# EAGLE board 1.5KbeaconDetectorV1.0 (EAGLE 9.6.2)
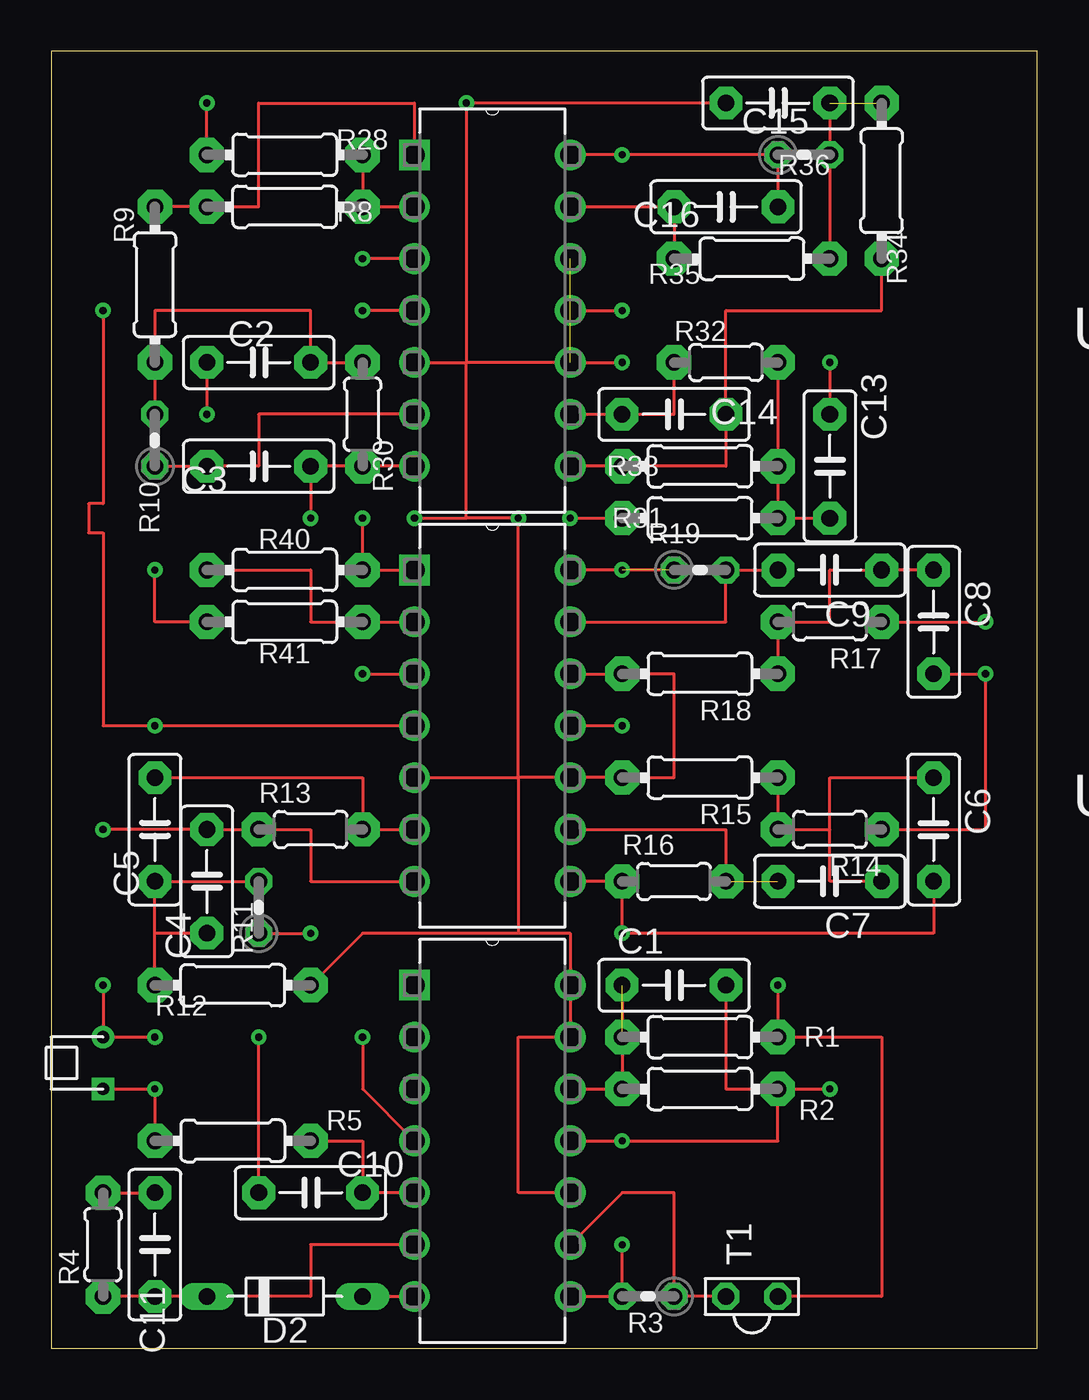
[diagram p0: board, top side]
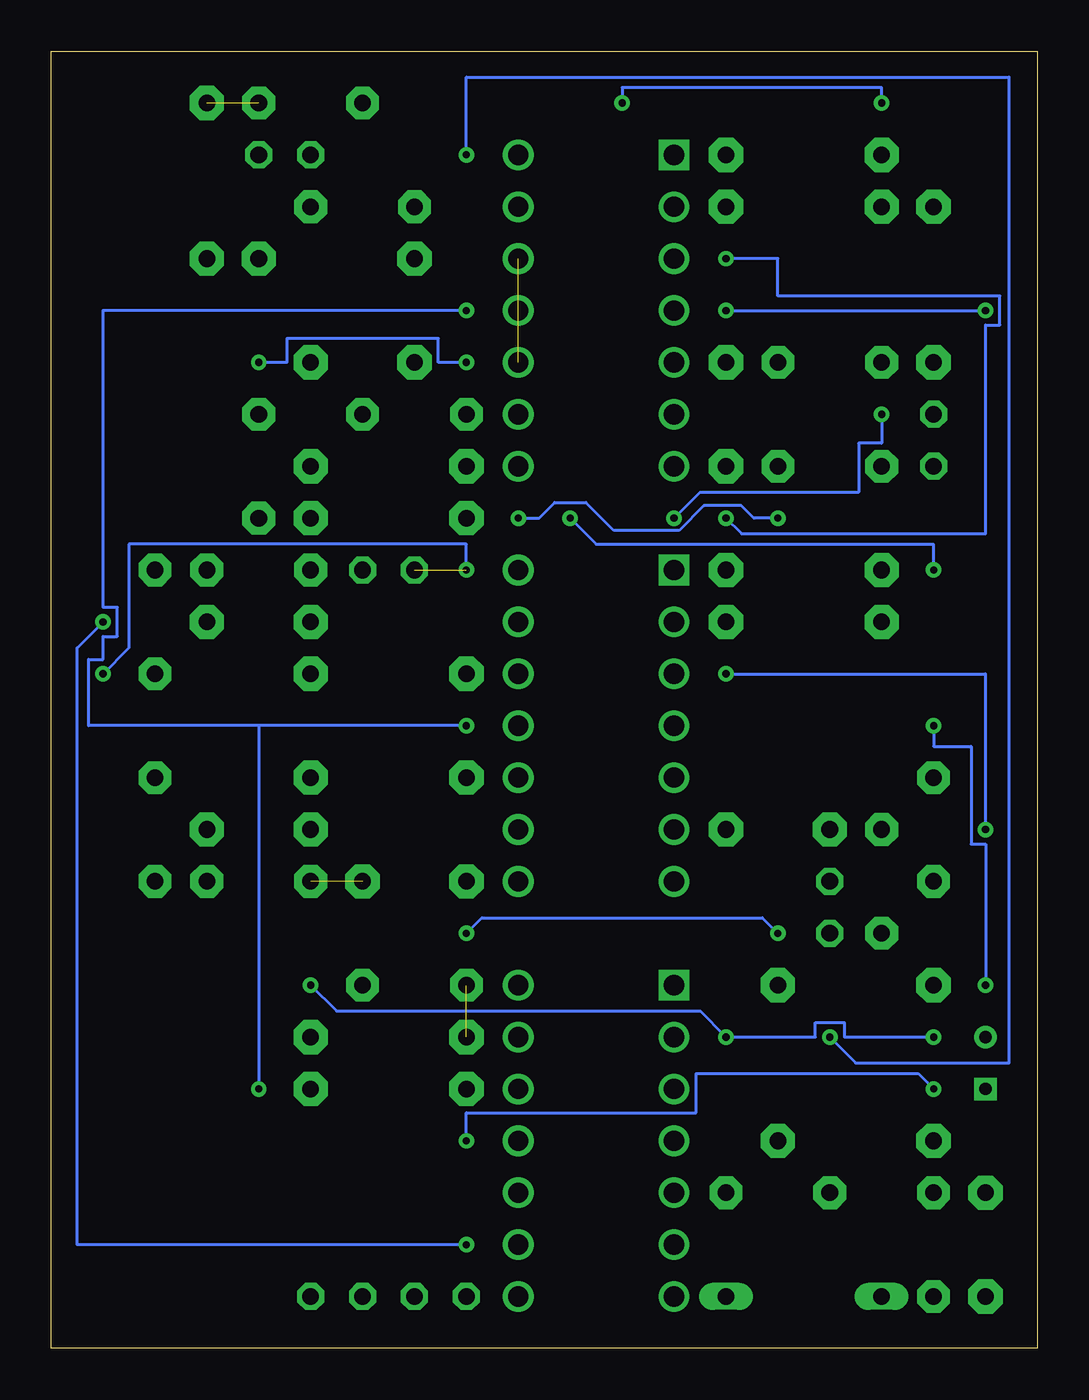
[diagram p1: board, bottom side, seen from below]

Size 48.26 x 63.5 mm. Coordinates in mm from the lower left corner, seen from the top.
Outline: 0,0 48.26,0 48.26,63.5 0,63.5 0,0
Copper layers (1*16): Top 0.035mm / dielectric 1.5mm / Bottom 0.035mm
Design rules "default": minimum track width 6mil, minimum drill 0.35mm, track to track 6mil, track to pad 6mil, pad to pad 6mil, via to via 6mil, smd to smd 6mil, copper to edge 40mil, drill to drill 6mil, minimum pad ring 10mil, minimum via ring 8mil, stop-mask expansion 4mil, vias tented up to drill 0mil, thermal gap 10mil

## Footprints (pad centres in the part's own frame; a part is rotated, then mirrored left to right if it is on the bottom)
C5B2.5 = drill 0.813 pad 1.6 octagon: 1 -2.54,0; 2 2.54,0
D-7.5 = drill 0.813 long: A 3.81,0; C -3.81,0
0204/7 = drill 0.813 pad 1.676 octagon: 1 -3.81,0; 2 3.81,0
0204V = drill 0.813 octagon: 1 -1.27,0; 2 1.27,0
0204/5 = drill 0.813 pad 1.676 octagon: 1 -2.54,0; 2 2.54,0
LPT80A = drill 0.813 octagon: C 0,-1.27; E 0,1.27
DIP254P762X533-14 = drill 0.991 square: 1 -7.62,15.24 | drill 0.991: 2 -7.62,12.7; 3 -7.62,10.16; 4 -7.62,7.62; 5 -7.62,5.08; 6 -7.62,2.54; 7 -7.62,0; 8 0,0; 9 0,2.54; 10 0,5.08; 11 0,7.62; 12 0,10.16; 13 0,12.7; 14 0,15.24
WIRECONNECT2PIN = drill 0.6 square: P$1 2.54,0 | drill 0.6: P$2 2.54,2.54

## Placement (x,y rotation side)
C1  10nF  [C5B2.5]  30.48,17.78 0 top
C2  56nF  [C5B2.5]  10.16,48.26 0 top
C3  10nF  [C5B2.5]  10.16,43.18 0 top
C4  10nF  [C5B2.5]  7.62,22.86 90 top
C5  10nF  [C5B2.5]  5.08,25.4 90 top
C6  10nF  [C5B2.5]  43.18,25.4 270 top
C7  10nF  [C5B2.5]  38.1,22.86 180 top
C8  10nF  [C5B2.5]  43.18,35.56 270 top
C9  10nF  [C5B2.5]  38.1,38.1 180 top
C10  0.1uF  [C5B2.5]  12.7,7.62 0 top
C11  0.1uF  [C5B2.5]  5.08,5.08 90 top
C13  470nF  [C5B2.5]  38.1,43.18 270 top
C14  10nF  [C5B2.5]  30.48,45.72 0 top
C15  5.6nF  [C5B2.5]  35.56,60.96 0 top
C16  10nF  [C5B2.5]  33.02,55.88 0 top
D2  [D-7.5]  11.43,2.54 0 top
R1  100kOhm  [0204/7]  31.75,15.24 0 top
R2  100kOhm  [0204/7]  31.75,12.7 180 top
R3  1kOhm  [0204V]  29.21,2.54 180 top
R4  330kOhm  [0204/5]  2.54,5.08 90 top
R5  8.2kOhm  [0204/7]  8.89,10.16 180 top
R8  91kOhm  [0204/7]  11.43,55.88 0 top
R9  11kOhm  [0204/7]  5.08,52.07 270 top
R10  12kOhm  [0204V]  5.08,44.45 90 top
R11  16kOhm  [0204V]  10.16,21.59 90 top
R12  330Ohm  [0204/7]  8.89,17.78 0 top
R13  300kOhm  [0204/5]  12.7,25.4 0 top
R14  18kOhm  [0204/5]  38.1,25.4 180 top
R15  390Ohm  [0204/7]  31.75,27.94 180 top
R16  330kOhm  [0204/5]  30.48,22.86 0 top
R17  18kOhm  [0204/5]  38.1,35.56 180 top
R18  750Ohm  [0204/7]  31.75,33.02 180 top
R19  160kOhm  [0204V]  31.75,38.1 0 top
R28  10kOhm  [0204/7]  11.43,58.42 180 top
R30  12kOhm  [0204/5]  15.24,45.72 90 top
R31  1.8kOhm  [0204/7]  31.75,40.64 0 top
R32  1.8Ohm  [0204/5]  33.02,48.26 0 top
R33  2kOhm  [0204/7]  31.75,43.18 0 top
R34  470Ohm  [0204/7]  40.64,57.15 90 top
R35  360Ohm  [0204/7]  34.29,53.34 0 top
R36  510Ohm  [0204V]  36.83,58.42 0 top
R40  91kOhm  [0204/7]  11.43,38.1 180 top
R41  10kOhm  [0204/7]  11.43,35.56 180 top
T1  LPT80A  [LPT80A]  34.29,2.54 90 top
U$1  MCP6004-E/P  [DIP254P762X533-14]  25.4,2.54 0 top
U$2  MCP6004-E/P  [DIP254P762X533-14]  25.4,22.86 0 top
U$4  WIRECONNECT2PIN  [WIRECONNECT2PIN]  0,12.7 0 top
U$5  MCP6004-E/P  [DIP254P762X533-14]  25.4,43.18 0 top

## Library data of the parts
C1-C11 C13-C16 = capacitor-wima
D2 = diode
R1-R5 R8-R19 R28 R30-R36 R40 R41 = adafruit
T1 = opto-trans-siemens; OC_FARNELL: unknown; OC_NEWARK: unknown
U$1 U$2 U$5 = MCP6004-E_P; DESCRIPTION: Op Amp Quad Low Power Amplifier R-R I/O 6V Automotive 14-Pin PDIP Tube; DIGI-KEY_PART_NUMBER: MCP6004-E/P-ND; MF: Microchip Technology; MP: MCP6004-E/P; PACKAGE: DIP-14 Microchip; PURCHASE-URL: https://pricing.snapeda.com/search/part/MCP6004-E/P/?ref=eda
U$4 = connectors

## Nets
1V65: C2.1 C13.1 C15.1 R12.2 R15.2 R18.2 R28.2 R41.2 U$1.10 U$1.13 U$1.14 U$2.5 U$2.10 U$2.12 U$5.5 U$5.10 U$5.12
AMPOUT: R8.1 R9.1 U$5.1
BPASS1: C8.2 R14.1 R19.1 U$2.14
BPASS2: C6.2 R11.1 R16.1 U$2.8
BPASS3: C4.2 R13.1 U$2.3 U$2.7
BPASSAMPOUT: R40.1 U$2.1 U$5.3
GND: C1.2 C11.2 R2.1 R4.2 R5.2 U$1.11 U$2.11 U$4.P$1 U$5.11
LPASS1: C3.2 R30.1 R31.1 U$5.7
LPASS2: C14.2 R33.1 R34.1 U$5.8
LPASS3: C10.1 C16.2 R36.1 U$5.14
N$1: C1.1 R1.1 R2.2 U$1.12
N$2: D2.A U$1.7
N$3: C10.2 R5.1 U$1.5
N$4: C3.1 R10.1 U$5.6
N$5: R3.1 T1.E U$1.9
N$6: C2.2 R9.2 R10.2 R30.2
N$8: C4.1 C5.1 R11.2 R12.1
N$9: C7.2 R16.2 U$2.9
N$10: C6.1 C7.1 R14.2 R15.1
N$11: C9.2 R19.2 U$2.13
N$12: C8.1 C9.1 R17.2 R18.1
N$13: C5.2 R13.2 U$2.6
N$18: R8.2 R28.1 U$5.2
N$19: C14.1 R32.1 U$5.9
N$20: C13.2 R31.2 R32.2 R33.2
N$22: C16.1 R35.1 U$5.13
N$25: R40.2 R41.1 U$2.2
N$26: C15.2 R34.2 R35.2 R36.2
PEAKDETECT: C11.1 D2.C R4.1 U$1.6
PHOTOBUFFER: R3.2 R17.1 U$1.8
VCC: R1.2 T1.C U$1.4 U$2.4 U$4.P$2 U$5.4

## Tracks (layer width: path | path; a pad name or v marks a point on that pad's centre or on a via)
1V65  (via drill 0.35)  (1 unrouted)
  Top 0.152: U$2.12 R18.2 30.48,33.02 30.48,27.94 R15.2 U$2.10 22.86,27.94 | 22.86,27.94 22.86,20.32 | 22.86,27.94 v22.86,40.64 20.32,40.64 | R41.2 5.08,35.56 v5.08,38.1 | U$2.5 22.86,27.94 | C2.1 v7.62,45.72 | v17.78,40.64 20.32,40.64 | 20.32,40.64 20.32,48.26 | U$5.5 20.32,48.26 | 20.32,48.26 U$5.10 v27.94,48.26 | R28.2 v7.62,60.96 | 20.32,48.26 v20.32,60.96 C15.1 | v38.1,48.26 C13.1 | U$1.10 22.86,7.62 22.86,15.24 U$1.13 U$1.14 25.4,20.32 22.86,20.32 | 22.86,20.32 15.24,20.32 R12.2
  Bottom 0.152: v22.86,40.64 21.59,39.37 5.08,39.37 v5.08,38.1 | v7.62,45.72 7.62,44.31 8.75,44.31 8.75,41.91 16.51,41.91 v17.78,40.64 | v7.62,60.96 7.62,61.72 20.32,61.72 v20.32,60.96 | v27.94,48.26 29.31,48.26 29.31,49.43 36.73,49.43 36.73,48.26 v38.1,48.26
AMPOUT
  Top 0.152: R9.1 R8.1 10.16,55.88 10.16,60.96 17.78,60.96 U$5.1
BPASS1  (via drill 0.35)  (1 unrouted)
  Top 0.152: R19.1 U$2.14 | R14.1 45.72,25.4 v45.72,33.02 C8.2
  Bottom 0.152: v45.72,33.02 44.45,34.29 44.45,39.37 27.94,39.37 v27.94,38.1
BPASS2  (via drill 0.35)
  Top 0.152: C6.2 43.18,20.32 v27.94,20.32 R16.1 U$2.8 | R11.1 v12.7,20.32
  Bottom 0.152: v27.94,20.32 27.18,21.08 13.46,21.08 v12.7,20.32
BPASS3  (via drill 0.35)
  Top 0.152: U$2.7 12.7,22.86 12.7,25.4 R13.1 C4.2 v2.54,25.4 | v15.24,33.02 U$2.3
  Bottom 0.152: v15.24,33.02 2.54,33.02 v2.54,25.4
BPASSAMPOUT  (via drill 0.35)
  Top 0.152: U$2.1 R40.1 v15.24,40.64 | U$5.3 v15.24,53.34
  Bottom 0.152: v15.24,53.34 12.7,53.34 12.7,51.51 1.83,51.51 1.83,50.09 2.54,50.09 2.54,39.88 14.48,39.88 v15.24,40.64
GND  (via drill 0.35)
  Top 0.152: U$2.11 v27.94,30.48 | U$5.11 v27.94,50.8 | R4.2 C11.2 | R2.1 35.56,10.16 v27.94,10.16 U$1.11 | C1.2 33.02,12.7 R2.1 | R2.1 v38.1,12.7 | R5.2 v5.08,12.7 U$4.P$1
  Bottom 0.152: v27.94,30.48 38.1,30.48 | 38.1,30.48 v38.1,12.7 | v27.94,50.8 45.72,50.8 45.72,36.27 45.01,36.27 45.01,34.85 45.72,34.85 45.72,33.73 46.43,33.73 46.43,30.48 38.1,30.48 | v5.08,12.7 5.84,13.46 16.7,13.46 16.7,11.53 27.94,11.53 v27.94,10.16
LPASS1  (via drill 0.35)
  Top 0.152: U$5.7 R30.1 C3.2 v12.7,40.64 | v25.4,40.64 R31.1
  Bottom 0.152: v25.4,40.64 24.38,40.64 23.62,41.4 22.1,41.4 20.73,40.03 17.53,40.03 16.32,41.25 14.48,41.25 13.87,40.64 v12.7,40.64
LPASS2
  Top 0.152: U$5.8 R33.1 33.02,43.18 C14.2 33.02,50.8 40.64,50.8 R34.1
LPASS3  (via drill 0.35)
  Top 0.152: C16.2 R36.1 v27.94,58.42 U$5.14 | C10.1 v10.16,15.24
  Bottom 0.152: v27.94,58.42 27.94,62.23 1.39,62.23 1.39,13.97 8.89,13.97 v10.16,15.24
N$1  (1 unrouted)
  Top 0.152: C1.1 R2.2 U$1.12
N$2
  Top 0.152: D2.A U$1.7
N$3
  Top 0.152: U$1.5 C10.2 15.24,10.16 R5.1
N$4
  Top 0.152: U$5.6 10.16,45.72 10.16,43.18 C3.1 R10.1
N$5
  Top 0.152: T1.E R3.1 30.48,7.62 27.94,7.62 U$1.9
N$6
  Top 0.152: R30.2 C2.2 12.7,50.8 5.08,50.8 R9.2 R10.2
N$8
  Top 0.152: R11.2 C5.1 5.08,20.32 | C4.1 5.08,20.32 | R12.1 5.08,20.32
N$9  (1 unrouted)
  Top 0.152: U$2.9 33.02,25.4 R16.2
N$10
  Top 0.152: 38.1,25.4 R14.2 R15.1 | C7.1 38.1,22.86 38.1,25.4 | 38.1,25.4 38.1,27.94 C6.1
N$11
  Top 0.152: C9.2 R19.2 33.02,35.56 U$2.13
N$12
  Top 0.152: C8.1 C9.1 38.1,38.1 38.1,35.56 R17.2 R18.1
N$13
  Top 0.152: C5.2 15.24,27.94 R13.2 U$2.6
N$18
  Top 0.152: R28.1 R8.2 U$5.2
N$19
  Top 0.152: U$5.9 C14.1 30.48,45.72 R32.1
N$20
  Top 0.152: R32.2 R33.2 R31.2 C13.2
N$22
  Top 0.152: R35.1 C16.1 U$5.13
N$25
  Top 0.152: R40.2 12.7,38.1 12.7,35.56 R41.1 U$2.2
N$26  (1 unrouted)
  Top 0.152: R35.2 R36.2 C15.2
PEAKDETECT
  Top 0.152: U$1.6 12.7,5.08 12.7,2.54 D2.C C11.1 R4.1
PHOTOBUFFER  (via drill 0.35)
  Top 0.152: R17.1 v45.72,35.56 | U$1.8 R3.2 v27.94,5.08
  Bottom 0.152: v45.72,35.56 46.99,34.29 46.99,5.08 45.72,5.08 v27.94,5.08
VCC  (via drill 0.35)
  Top 0.152: U$5.4 v15.24,50.8 | v15.24,15.24 15.24,12.7 U$1.4 | T1.C 40.64,2.54 40.64,15.24 R1.2 v35.56,17.78 | v5.08,15.24 U$4.P$2 v2.54,17.78 | v2.54,50.8 2.54,41.35 1.83,41.35 1.83,39.93 2.54,39.93 2.54,30.48 v5.08,30.48 U$2.4
  Bottom 0.152: v15.24,50.8 v2.54,50.8 | v35.56,17.78 34.29,16.51 16.51,16.51 v15.24,15.24 10.87,15.24 10.87,15.95 9.45,15.95 9.45,15.24 v5.08,15.24 | v5.08,30.48 5.08,29.46 3.25,29.46 3.25,24.69 2.54,24.69 v2.54,17.78